# EAGLE board AutoRoute-8 (EAGLE 7.5.0)
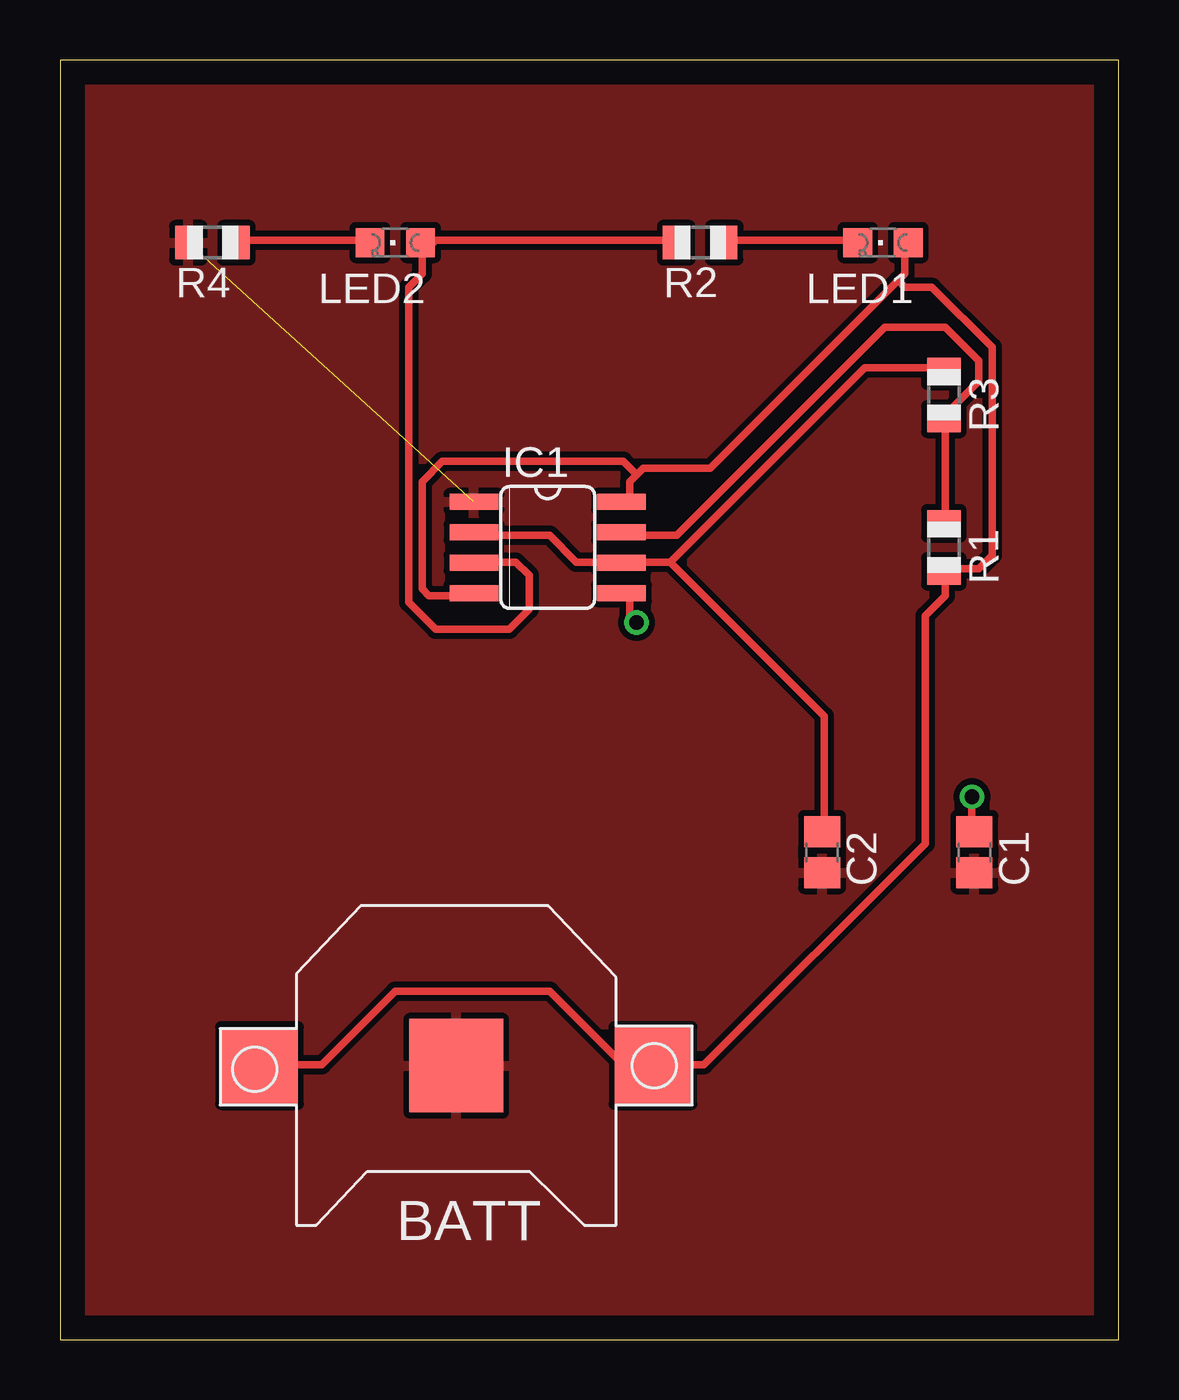
[diagram p0: board, top side]
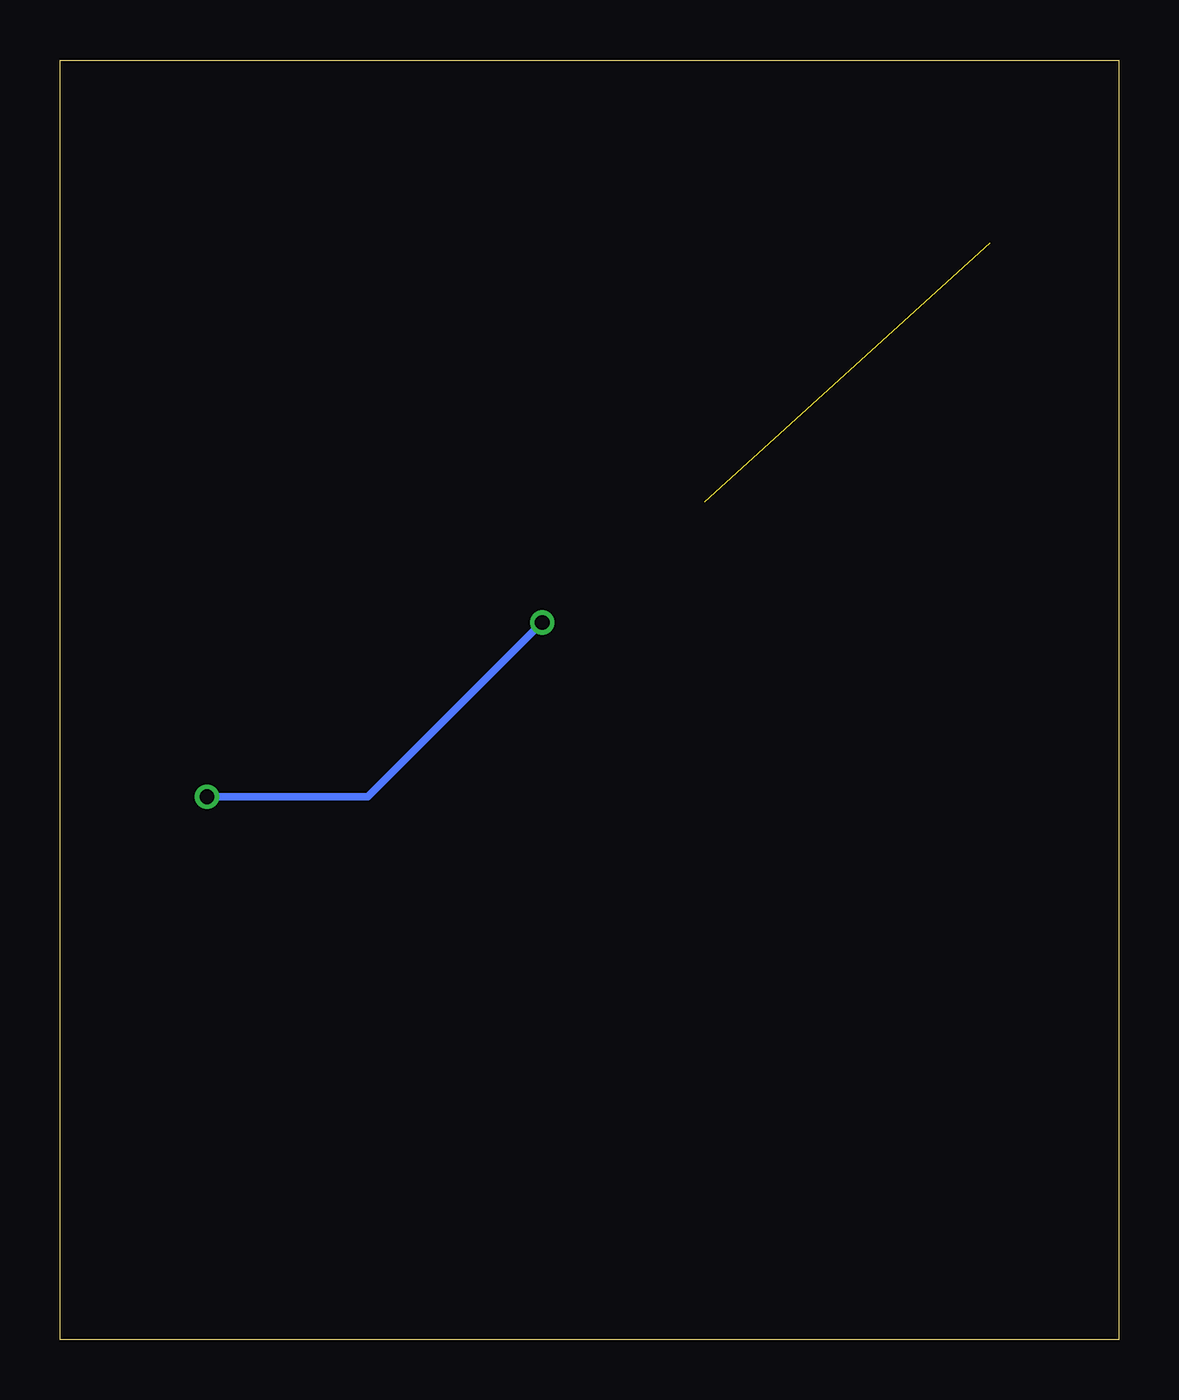
[diagram p1: board, bottom side, seen from below]

Size 44.12 x 53.33 mm. Coordinates in mm from the lower left corner, seen from the top.
Outline: 0,0 44.12,0 44.12,53.33 0,53.33 0,0
Copper layers (1*16): Top 0.035mm / dielectric 1.5mm / Bottom 0.035mm
Design rules "default": minimum track width 10mil, minimum drill 24mil, track to track 8mil, track to pad 8mil, pad to pad 8mil, via to via 8mil, smd to smd 8mil, copper to edge 40mil, drill to drill 8mil, minimum pad ring 10mil, minimum via ring 8mil, stop-mask expansion 4mil, vias tented up to drill 0mil, thermal gap 10mil
Net classes: 0 default: width 0.305 mm, drill 0.508 mm, clearance 0.254 mm

## Footprints (pad centres in the part's own frame; a part is rotated, then mirrored left to right if it is on the bottom)
CR1220-SMD = smd 3.2 x 3.2: +$1 -8.2,0; +$2 8.2,0 | smd 3.9 x 3.9: - 0,0
C0805 = smd 1.3 x 1.5: 1 -0.85,0; 2 0.85,0
SO08 = smd 0.66 x 2.032: 1 -1.905,-3.073; 2 -0.635,-3.073; 3 0.635,-3.073; 4 1.905,-3.073; 5 1.905,3.073; 6 0.635,3.073; 7 -0.635,3.073; 8 -1.905,3.073
CHIPLED_0805 = smd 1.2 x 1.2: A 0,-1.05; C 0,1.05
R0805 = smd 1.1 x 1.4: 1 -1,0; 2 1,0

## Placement (x,y rotation side)
BATT  CR1220  [CR1220-SMD]  16.51,11.43 180 top
C1  .01uF  [C0805]  38.1,20.32 270 top
C2  22mF  [C0805]  31.75,20.32 270 top
IC1  LM555D  [SO08]  20.32,33.02 270 top
LED1  green  [CHIPLED_0805]  34.29,45.72 90 top
LED2  green  [CHIPLED_0805]  13.97,45.72 90 top
R1  1K  [R0805]  36.83,33.02 270 top
R2  100  [R0805]  26.67,45.72 180 top
R3  100K  [R0805]  36.83,39.37 270 top
R4  100  [R0805]  6.35,45.72 180 top

## Library data of the parts
BATT C1 C2 IC1 LED1 LED2 R1-R4 = adafruit

## Nets
CONN: C2.1 IC1.2 IC1.6 R3.1
GND: BATT.- C1.2 C2.2 IC1.1 R4.2
N$1: LED1.C R2.1
N$2: IC1.3 LED2.A R2.2
N$3: LED2.C R4.1
N$4: IC1.7 R1.1 R3.2
N$8: C1.1 IC1.5
VCC: BATT.+$1 BATT.+$2 IC1.4 IC1.8 LED1.A R1.2

## Tracks (layer width: path | path; a pad name or v marks a point on that pad's centre or on a via)
CONN
  Top 0.305: 25.43,32.41 33.53,40.51 36.6,40.51 R3.1 | 25.43,32.41 23.47,32.41 IC1.6 23.19,32.41 21.51,32.41 20.4,33.53 17.32,33.53 IC1.2 | 25.43,32.41 31.85,25.98 31.85,21.23 C2.1
GND  (1 unrouted)
  pour Top: -1.27,54.61 -1.27,-2.54 45.72,-2.54 45.72,-1.27 45.72,54.61
N$1
  Top 0.305: LED1.C 32.97,45.82 27.94,45.82 R2.1
N$2
  Top 0.305: 15.65,45.82 25.43,45.82 R2.2 | 15.65,45.82 15.09,45.82 LED2.A | 15.65,45.82 15.09,45.26 15.09,44.42 14.53,43.87 14.53,30.73 15.65,29.62 18.72,29.62 19.56,30.45 19.56,31.85 19,32.41 17.32,32.41 IC1.3
N$3
  Top 0.305: LED2.C 12.85,45.82 7.54,45.82 R4.1
N$4
  Top 0.305: R1.1 36.88,34.09 36.88,38.28 R3.2 36.88,38.56 38.28,39.95 38.28,40.79 36.88,42.19 34.37,42.19 25.7,33.53 23.47,33.53 IC1.7
N$8  (via drill 0.61)
  Top 0.305: v38,22.63 38,21.23 C1.1 | v24.03,29.9 23.75,30.18 23.75,31.01 23.47,31.29 IC1.5
  Bottom 0.305: v38,22.63 31.29,22.63 v24.03,29.9
VCC
  Top 0.305: BATT.+$2 8.38,11.46 10.9,11.46 13.97,14.53 20.4,14.53 23.47,11.46 24.59,11.46 BATT.+$1 24.87,11.46 26.82,11.46 36.04,20.68 36.04,30.18 36.88,31.01 36.88,31.57 37.44,32.13 | 34.92,44.15 27.1,36.32 24.31,36.32 24.03,36.04 | 34.92,44.15 35.2,44.42 35.2,45.54 LED1.A | 24.03,36.04 23.75,35.76 23.75,34.92 IC1.8 | 37.44,32.13 38.28,32.13 38.84,32.69 38.84,41.35 36.32,43.87 35.2,43.87 34.92,44.15 | 37.44,32.13 36.88,32.13 R1.2 37.44,32.13 | 24.03,36.04 23.47,36.6 15.93,36.6 15.09,35.76 15.09,31.29 15.37,31.01 17.04,31.01 IC1.4